# Altium PCB Hex_Link_Trans.PcbDoc
Units mm, origin at the board's own origin, x right, y up, seen from the top; angles counter-clockwise.
Board outline 30.31 x 32.92 mm, 2 copper layers (Top1, Bottom4), stack 1.071 mm thick; 57 components, 58 nets, 261 pads, 73 vias.
Unrouted connection lines stored in the file: 58.
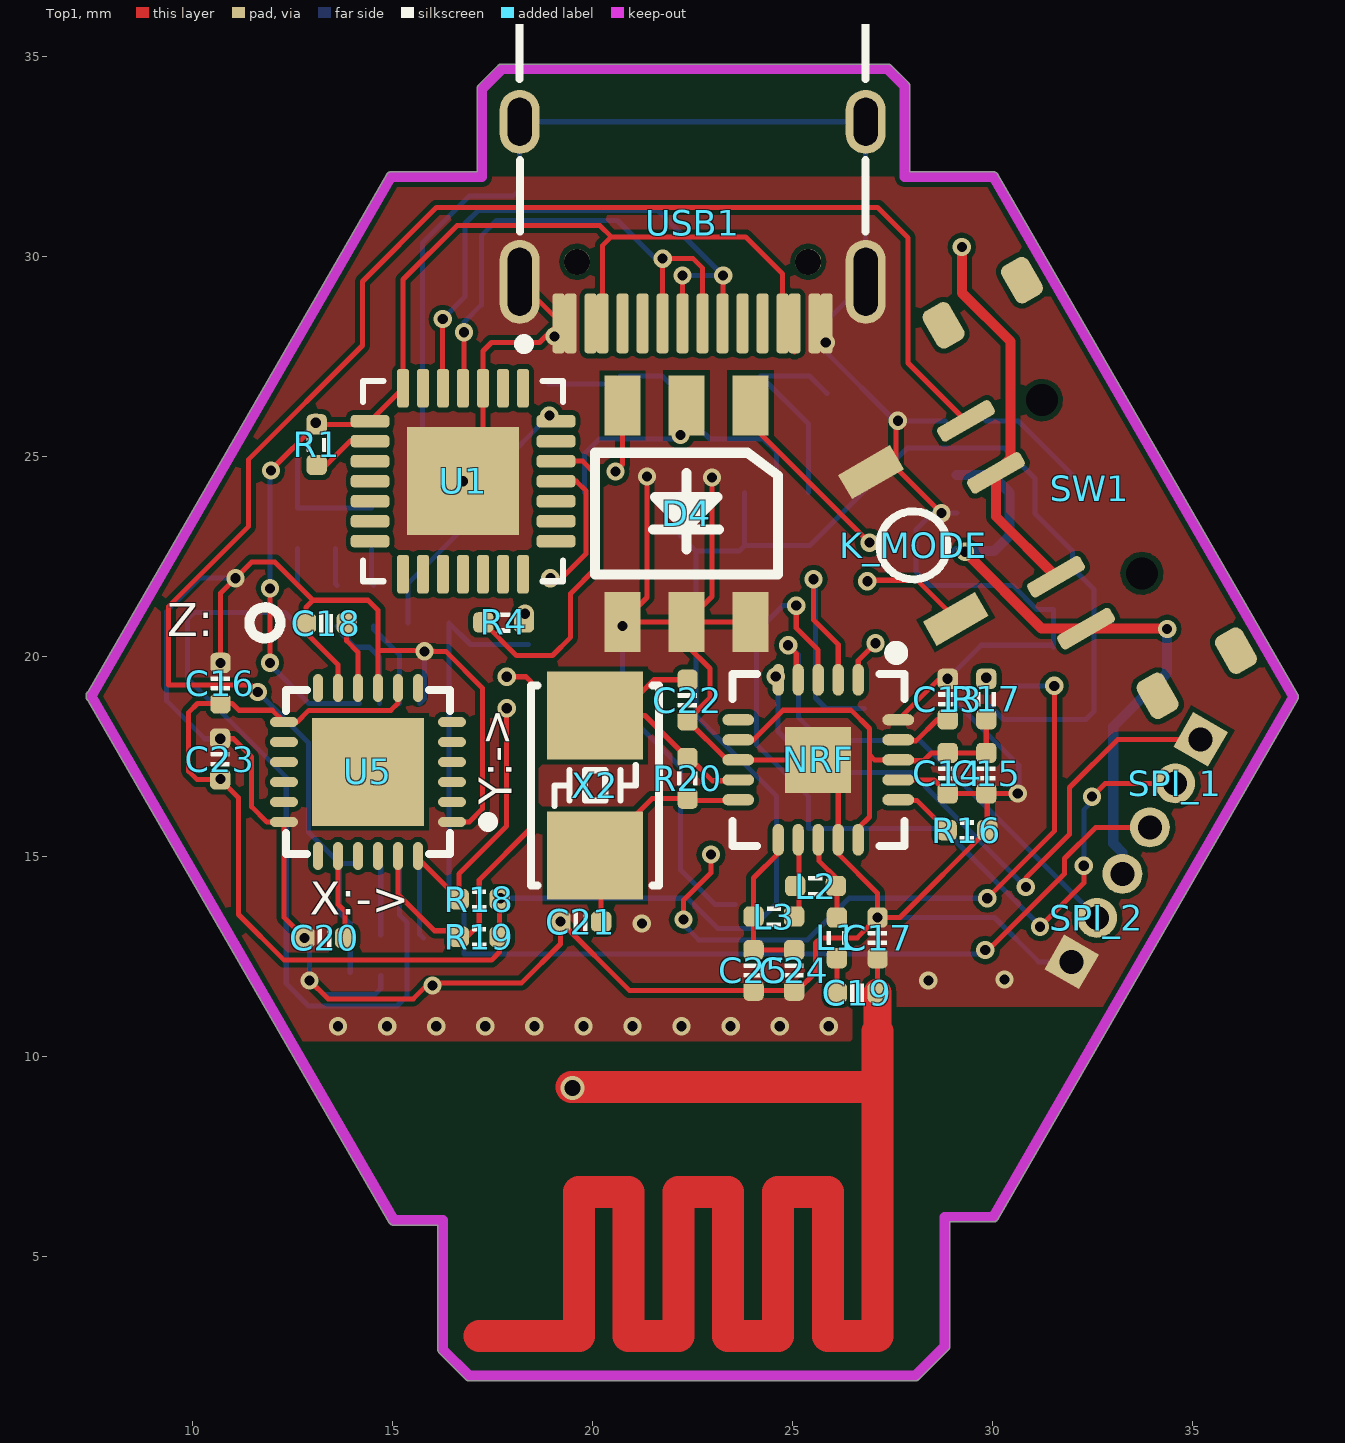
[diagram p0: Top1 view]
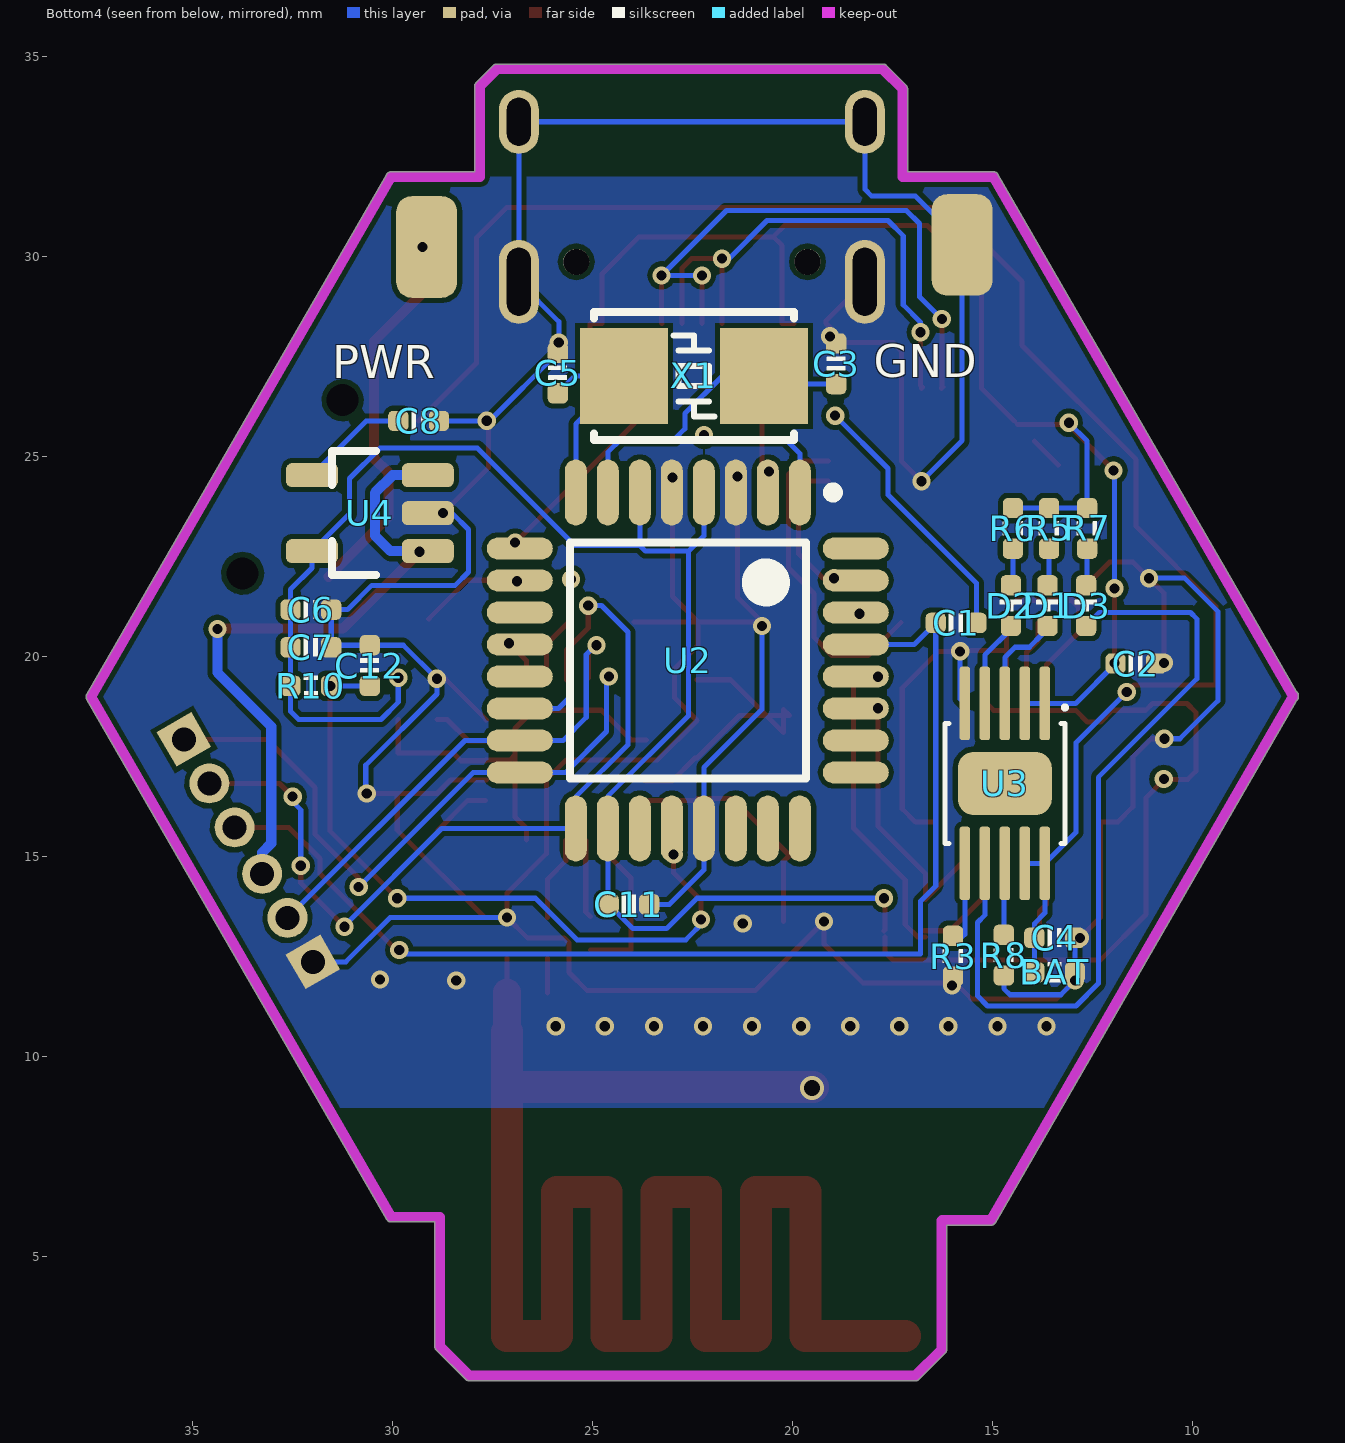
[diagram p1: Bottom4 view, seen from below]
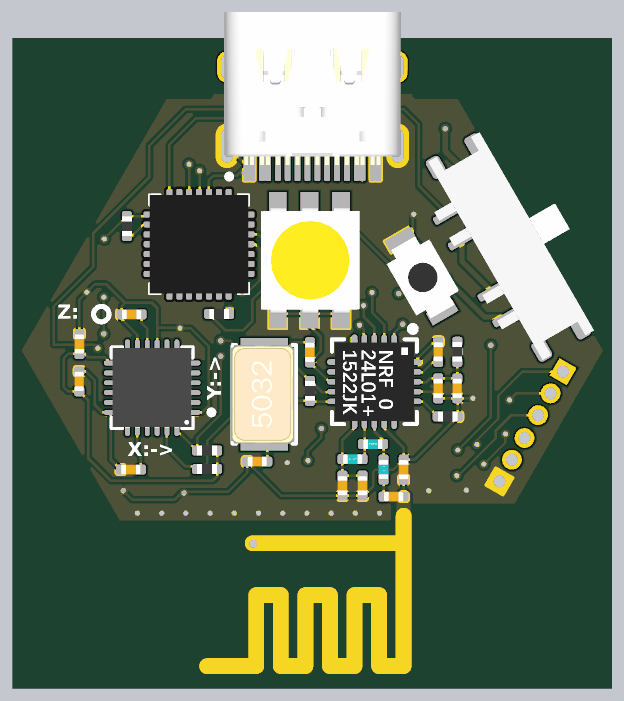
[diagram p2: 3D render of the assembled board from above, using the file's embedded part models]
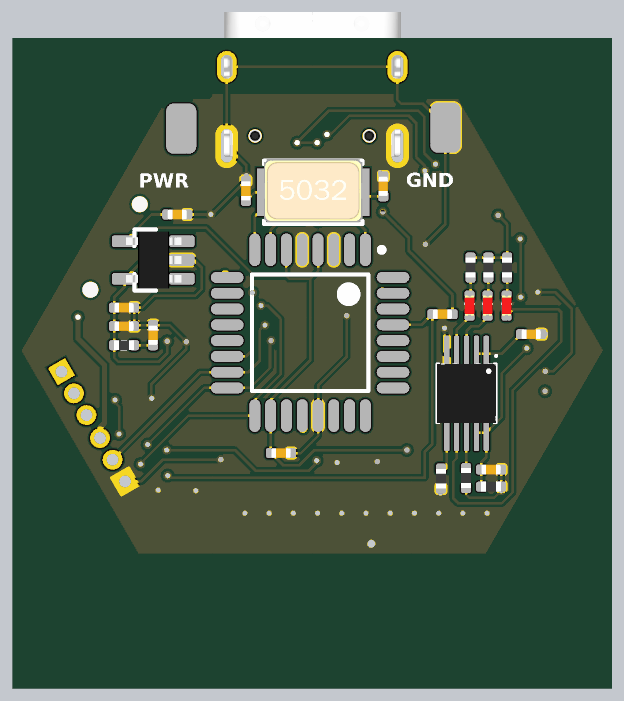
[diagram p3: 3D render of the assembled board from below, using the file's embedded part models]

## Layer stack, top to bottom
Top Solder: solder mask 0.0102, Solder Resist, Dk 3.5
Top1: signal copper 0.0356
Dielectric 2: core 1, PP-006, Dk 4.2
Bottom4: signal copper 0.0356
Bottom Solder: solder mask 0.0102, Solder Resist, Dk 3.5

## Board outline
15.035,5.79 16.136,5.79 16.136,2.685 ccw(c16.264,2.685) 16.174,2.594 16.174,2.595 16.826,1.942 ccw(c16.916,2.032) 16.952,1.91 ccw(c16.99,2.031) 16.99,1.904 28.07,1.904 ccw(c28.07,2.031) 28.16,1.942 28.16,1.941 28.899,2.68 ccw(c28.809,2.77) 28.936,2.77 28.936,5.876 30.023,5.876 ccw(c30.023,6.003) 30.133,5.94 37.633,18.939 37.633,18.94 37.633,18.939 ccw(c37.523,19.003) 37.65,19.003 ccw(c37.523,19.003) 37.633,19.067 30.133,32.067 ccw(c30.023,32.003) 30.02,32.131 ccw(c30.017,32.003) 30.017,32.131 27.935,32.131 27.935,34.269 ccw(c27.807,34.269) 27.897,34.36 27.898,34.359 27.471,34.786 27.471,34.785 ccw(c27.381,34.696) 27.381,34.823 17.729,34.823 ccw(c17.729,34.696) 17.638,34.785 17.639,34.786 17.151,34.298 ccw(c17.241,34.208) 17.114,34.208 17.114,32.131 14.965,32.131 ccw(c14.965,32.003) 14.854,32.067 7.396,19.14 ccw(c7.467,19.034) 7.341,19.021 ccw(c7.467,19.008) 7.396,18.902 14.924,5.854 ccw(c15.035,5.917)

## Design rules (kind name [scope] priority, off if disabled: settings)
Clearance [All] p1: gap=0.127 ignorepadtopadclearanceinfootprint=FALSE
ComponentClearance [All] p1: gap=0 collisioncheckmode=3 verticalgap=0 showdistances=FALSE
DiffPairsRouting [All] p1: maxlimit=0.229 minlimit=0.229 mostfreqgap=0.229 toplayer_minwidth=0.102 toplayer_maxwidth=0.102 toplayer_prefwidth=0.102 bottomlayer_minwidth=0.102 bottomlayer_maxwidth=0.102 bottomlayer_prefwidth=0.102 maxuncoupledlength=12.7
FanoutControl Fanout_BGA [All] p1: bgadir=Out bgaviamode=Centered fanoutstyle=Auto fanoutdirection=Alternating viagrid=0.025 // Fanout_BGA (Default Rule)
HoleSize [All] p1: absolutevalues=TRUE maxlimit=254 minlimit=0.203 maxpercent=80.000 minpercent=20.000
MinimumSolderMaskSliver [All] p1 off: minsoldermaskwidth=0.051
PlaneClearance [All] p1: clearance=0.203
PlaneConnect [All] p1: planeconnectstyle=Direct reliefexpansion=0.508 reliefentries=4 reliefconductorwidth=0.254 reliefairgap=0.254
PolygonConnect [All] p1: connectstyle=Direct reliefconductorwidth=0.254 reliefentries=4 polygonreliefangle="90 Angle" airgapwidth=0.254
RoomDefinition Arduino_Mouse_Keyboard [InComponentClass('Arduino_Mouse_Keyboard')] p1: confinementstyle=ConfineIn formatcopy=TRUE lockcomponents=FALSE outline -0.432,-0.179 46.964,-0.179 46.964,41.198 -0.432,41.198
RoutingVias [All] p1: holewidth=0.203 width=0.406 viastyle="Through Hole" minholewidth=0.152 minwidth=0.305 maxholewidth=0.711 maxwidth=1.27
SilkToBoardRegionClearance [All] p1 off:
SilkToSilkClearance [All] p1: silktosilkclearance=0
SilkToSolderMaskClearance [IsPad] p1: minsilkscreentomaskgap=0 clearancetoexposedcopper=TRUE
SolderMaskExpansion [All] p1: expansion=0.076
Width BAT [InNet('VBAT')] p1: maxlimit=0.254 minlimit=0.254 preferedwidth=0.254
Width BAT_IN [InNet('VBAT_IN')] p2: maxlimit=0.254 minlimit=0.254 preferedwidth=0.254
Width [All] p3: maxlimit=254 minlimit=0.127 preferedwidth=0.127
20 further rules are at their usual default settings.

## Components (designator, comment, footprint, x,y, rotation, side; value= is the part's Value field where it differs from the comment)
BAT "1K" RES_0402 13.436,12.115 r180 bottom
C1 "0.1uF" CAP_0402 15.9,20.853 r180 bottom
C2 "10uF" CAP_0402 11.404,19.837 r180 bottom
C3 "20pF" CAP_0402 18.897,27.33 r90 bottom
C4 "10uF" CAP_0402 13.436,12.979 r0 bottom
C5 "20pF" CAP_0402 25.857,27.101 r90 bottom
C6 "0.1uF" CAP_0402 32.029,21.183 r180 bottom value=0.1u
C7 "10uF" CAP_0402 32.029,20.243 r180 bottom
C8 "10nF" CAP_0402 29.337,25.902 r0 bottom value=0.1u
C11 "0.1uF" CAP_0402 24.079,13.817 r180 bottom
C12 "0.1uF" CAP_0402 30.556,19.786 r90 bottom
C13 "33nF" CAP_0402 28.88,18.948 r270 top
C14 "10nF" CAP_0402 28.88,17.093 r270 top
C15 "10nF" CAP_0402 29.845,17.093 r270 top
C16 "10nF" CAP_0402 10.701,19.345 r90 top value=0.1u
C17 "1.0pF" CAP_0402 27.127,12.979 r270 top
C18 "0.1uF" CAP_0402 13.346,20.843 r180 top value=0.1u
C19 "1.5pF" CAP_0402 26.619,11.607 r0 top
C20 "2.2nF" CAP_0402 13.309,12.979 r0 top value=0.1u
C21 "22pF" CAP_0402 19.71,13.385 r180 top
C22 "22pF" CAP_0402 22.377,18.922 r90 top
C23 "0.1uF" CAP_0402 10.693,17.449 r90 top
C24 "2.2nF" CAP_0402 25.044,12.166 r270 top
C25 "4.7pF" CAP_0402 24.028,12.166 r270 top
D1 "color?" LED_0402_RED 13.614,21.284 r270 bottom
D2 "color?" LED_0402_RED 14.529,21.284 r270 bottom
D3 "color?" LED_0402_RED 12.649,21.284 r270 bottom
D4 "LED-5050" LED-5050W 24.003,26.25 r270 top
K_MODE "RST" SW_PB 27.918,22.826 r120 top
L1 "3.9nH" 0402L_2 26.111,12.979 r90 top
L2 "8.2nH" 0402L_2 25.578,14.274 r180 top
L3 "2.7nH" 0402L_2 24.536,13.512 r0 top
NRF "NRF24L01P-R" QFN20 25.644,17.429 r180 top
R1 "10K" RES_0402 13.106,25.309 r270 top value=22R
R3 "2K" RES_0402 15.976,12.521 r90 bottom value=22R
R4 "200R" RES_0402 17.78,20.865 r180 top value=22R
R5 "1K" RES_0402 13.575,23.215 r270 bottom value=22R
R6 "1K" RES_0402 14.478,23.215 r270 bottom value=22R
R7 "1K" RES_0402 12.624,23.215 r270 bottom value=22R
R8 "10K" RES_0402 14.706,12.547 r90 bottom value=22R
R10 "1K" RES_0402 32.029,19.278 r180 bottom value=22R
R16 "22K" RES_0402 29.362,15.671 r180 top
R17 "0" RES_0402 29.845,18.948 r90 top
R18 "2.2K" RES_0402 17.17,13.944 r0 top
R19 "2.2K" RES_0402 17.17,13.004 r0 top
R20 "1M" RES_0402 22.377,16.966 r90 top
SPI_1 "Header3_1.27mm" HEADER3_1.27mm 35.204,17.939 r330 top
SPI_2 "Header3_1.27mm" HEADER3_1.27mm 31.978,12.379 r150 top
SW1 "4Pin_sw" 4pin_SW 32.486,24.256 r300 top
U1 "CP2102" QFN-28 16.764,24.395 r270 top value=Value
U2 "ATmega8L-8AI" 32A_N 22.606,19.913 r270 bottom
U3 "MCP73833T-AMI/MF" QFN_10_L 14.681,16.839 r90 bottom
U4 "LP2992 3V3" SOT23-5 30.607,23.596 r0 bottom
U5 "MPU6050" QFN-24 14.388,17.127 r180 top
USB1 "Type-C" TYPE-C-TOP 22.504,30.86 r90 top
X1 "16MHz" "OSC 5032-2P" 22.453,27.025 r180 bottom
X2 "16MHz" "OSC 5032-2P" 20.066,16.789 r90 top

## Footprints (in the part's own frame and the unit in brackets; to place one, negate y for a bottom-side part, rotate by r counter-clockwise, add the part's x,y. Pads: shape width x height; smd on the part's side, far side on the other; paste and mask are expansions set on the pad)
4pin_SW [mil]
  rrect50% 42x30 smd: 0(-210.63,42) 0(-210.63,-47) 0(210.63,42) 0(210.63,-47)
  round 10 hole 31.5: 0(-98.43,0) 0(98.43,0)
  rrect50% 16x60 smd: 1(-118.11,-75) 2(-59.06,-75) 3(59.06,-74.8) 4(118.11,-74.8)
  body extent -228,-95 228,122, height 59
32A_N [mm] "Thin QFP, 32-Leads, Body 7x7mm, Pitch 0.8mm, IPC Medium Density"
  oval 1.65x0.55 smd: 1(-4.2,2.8) 2(-4.2,2) 3(-4.2,1.2) 4(-4.2,0.4) 5(-4.2,-0.4) 6(-4.2,-1.2) 7(-4.2,-2) 8(-4.2,-2.8) 17(4.2,-2.8) 18(4.2,-2) 19(4.2,-1.2) 20(4.2,-0.4) 21(4.2,0.4) 22(4.2,1.2) 23(4.2,2) 24(4.2,2.8)
  oval 0.55x1.65 smd: 9(-2.8,-4.2) 10(-2,-4.2) 11(-1.2,-4.2) 12(-0.4,-4.2) 13(0.4,-4.2) 14(1.2,-4.2) 15(2,-4.2) 16(2.8,-4.2) 25(2.8,4.2) 26(2,4.2) 27(1.2,4.2) 28(0.4,4.2) 29(-0.4,4.2) 30(-1.2,4.2) 31(-2,4.2) 32(-2.8,4.2)
  silkscreen extent -4.32,-2.95 2.95,3.75, body extent -3.5,-3.5 3.5,3.5, height 1.2
0402L_2 [mil]
  rrect50% 20x20 smd: 1(20,0) 2(-20,0)
  silkscreen extent -7,-10 7,10, body extent -19,-10 20,10, height 20
CAP_0402 [mil]
  rrect50% 20x20 smd: 1(-20,0) 2(20,0)
  silkscreen extent -7,-9 7,9, body extent -20,-10 20,10, height 20
HEADER3_1.27mm [mm]
  rect 1x1 hole 0.6: 1(0,0)
  round 1 hole 0.6: 2(0,-1.27) 3(0,-2.54)
LED-5050W [mm]
  rect 1.5x0.9 smd: 1(-0.038,-0.051) 2(5.372,-0.051) 3(-0.038,-1.651) 4(5.372,-1.651) 5(-0.038,-3.251) 6(5.372,-3.251)
  silkscreen extent 1.14,-3.94 4.19,0.64, body extent -0.03,-4.11 5.37,0.89, height 1.65
LED_0402_RED [mil]
  rrect50% 20x20 smd: 1(-20,0) 2(20,0)
  silkscreen extent -6,-10 6,11, body extent -20,-10 20,10, height 18
"OSC 5032-2P" [mm]
  rect 2.2x2.4 smd: 1(-1.75,0) 2(1.75,0)
  silkscreen extent -2.5,-1.6 2.5,1.6, body extent -2.5,-1.52 2.5,1.68, height 0.86
QFN20 [mm]
  oval 0.28x0.796 smd: 1(-1.001,-2.002) 2(-0.5,-2.002) 3(0,-2.002) 4(0.5,-2.002) 5(0.998,-2.002)
  oval 0.794x0.28 smd: 6(1.999,-1.001) 7(1.999,-0.5) 8(1.999,0) 9(1.999,0.5) 10(1.999,0.998)
  oval 0.28x0.794 smd: 11(0.998,1.999) 12(0.5,1.999) 13(0,1.999) 14(-0.5,1.999) 15(-1.001,1.999)
  oval 0.796x0.28 smd: 16(-2.002,0.998) 17(-2.002,0.5) 18(-2.002,0) 19(-2.002,-0.5) 20(-2.002,-1.001)
  rect 1.651x1.651 smd: 21(0,0)
  silkscreen extent -2.15,-2.82 2.15,2.15, body extent -2,-2 2,2, height 0.85
QFN-24 [mm] "QFN, 24-Leads, Body 4.1x4.1mm (max), Pitch 0.50mm, IPC Low Density"
  oval 0.7x0.25 smd: 1(-2.1,1.25) 2(-2.1,0.75) 3(-2.1,0.25) 4(-2.1,-0.25) 5(-2.1,-0.75) 6(-2.1,-1.25) 13(2.1,-1.25) 14(2.1,-0.75) 15(2.1,-0.25) 16(2.1,0.25) 17(2.1,0.75) 18(2.1,1.25)
  oval 0.25x0.7 smd: 7(-1.25,-2.1) 8(-0.75,-2.1) 9(-0.25,-2.1) 10(0.25,-2.1) 11(0.75,-2.1) 12(1.25,-2.1) 19(1.25,2.1) 20(0.75,2.1) 21(0.25,2.1) 22(-0.25,2.1) 23(-0.75,2.1) 24(-1.25,2.1)
  rect 2.8x2.7 smd: ""(0,0)
  silkscreen extent -3.13,-2.05 2.05,2.05, body extent -2.02,-2.02 2.02,2.02, height 0.95
QFN-28 [mil]
  rrect50% 38x12 smd mask+5: 1(-91.5,59.06) 2(-91.5,39.37) 3(-91.5,19.68) 4(-91.5,0) 5(-91.5,-19.69) 6(-91.5,-39.37) 7(-91.5,-59.06) 15(91.5,-59.06) 16(91.5,-39.37) 17(91.5,-19.69) 18(91.5,0) 19(91.5,19.68) 20(91.5,39.37) 21(91.5,59.06)
  rrect50% 12x38 smd mask+5: 8(-59.06,-91.5) 9(-39.37,-91.5) 10(-19.69,-91.5) 11(0,-91.5) 12(19.68,-91.5) 13(39.37,-91.5) 14(59.06,-91.5) 22(59.06,91.5) 23(39.37,91.5) 24(19.68,91.5) 25(0,91.5) 26(-19.69,91.5) 27(-39.37,91.5) 28(-59.06,91.5)
  rect 106.3x110.24 smd: 29(0,0)
  silkscreen extent -140,-99 99,98, body extent -99,-99 98,98, height 35
QFN_10_L [mm]
  rrect50% 1.84x0.26 smd: 1(2,-1) 2(2,-0.5) 3(2,0) 4(2,0.5) 5(2,1) 6(-2,1) 7(-2,0.5) 8(-2,0) 9(-2,-0.5) 10(-2,-1)
  rrect50% 1.58x2.35 smd: 11(0,0)
  silkscreen extent -1.5,-1.55 1.95,1.5, body extent -1.5,-1.5 1.5,1.5, height 0.6
RES_0402 [mil]
  rrect50% 20x20 smd: 1(-20,0) 2(20,0)
  silkscreen extent -7,-10 7,10, body extent -20,-10 20,10, height 14
SOT23-5 [mm] "SOT23, 3-Leads, Body 3.1x3.0mm (max), Pitch 0.95mm, IPC Medium Density"
  rrect50% 1.3x0.6 smd: 1(-1.5,0.95) 2(-1.5,0) 3(-1.5,-0.95) 4(1.396,-0.95) 5(1.396,0.95)
  silkscreen extent -0.2,-1.55 0.9,1.55, body extent -1.48,-1.45 1.32,1.45, height 1.2
SW_PB [mm]
  rect 0.7x1.5 smd: 1(-2.203,-0.073) 2(2.032,-0.073)
  silkscreen extent -0.93,-0.92 0.77,0.78, body extent -2.19,-1.35 1.81,1.15, height 1.6
TYPE-C-TOP [mm]
  round 0.65 hole 0.65: 0(-0.98,2.89) 0(-0.98,-2.89)
  oval 1.6x1 hole 0.6 slot 1.2 at 0 deg: 1(2.52,4.325) 2(2.52,-4.325)
  oval 2.1x1 hole 0.6 slot 1.7 at 0 deg: 3(-1.48,-4.325) 4(-1.48,4.325)
  rrect50% 1.5x0.3 smd: A1(-2.52,-3.35) A4(-2.52,-2.55) A5(-2.52,-1.25) A6(-2.52,-0.25) A7(-2.52,0.25) A8(-2.52,1.25) A9(-2.52,2.55) A12(-2.52,3.35) B1(-2.52,3.05) B4(-2.52,2.25) B5(-2.52,1.75) B6(-2.52,0.75) B7(-2.52,-0.75) B8(-2.52,-1.75) B9(-2.52,-2.25) B12(-2.52,-3.05)
  silkscreen extent -0.22,-4.33 5.12,4.33, body extent -2.44,-4.48 5.31,4.48, height 3.26

## Part data
BAT R16 R17 R18 R19 R20: library part RES
C1 C2 C3 C4 C5 C7 C11 C12 C13 C14 C15 C17 C19 C21 C22 C23 C24 C25: library part CAP, "无极性电容"
C6 C8 C16 C18 C20: library part 电容-0402, "Capacitor"
D1 D2 D3: library part LED_0402, "LED", Type=0402
K_MODE: library part SW-PB, "Switch", LatestRevisionDate=17-Jul-2002, LatestRevisionNote="Re-released for DXP Platform.", PackageDescription="Switch; 2 Leads", PackageReference=SPST-2, Published=24-Mar-1999, Publisher="Altium Limited"
L1 L2 L3: library part INDUCTOR, "INDUCTOR"
R1 R3 R4 R5 R6 R7 R8 R10: library part 电阻-0402, "Resistor"
U1: "USBתTTL", MFG #1="SILICON LABS", PART DESC="SINGLE-CHIP USB TO UART BRIDGE, QFN28, RoHS.", PART NUMBER=CP2102, RefDes=RefDes, Type=DEV
U2: "8-Bit AVR Microcontroller with 8K Bytes of In-System Programmable Flash Memory", Code_JEDEC=MS-026-ABA, ComponentLink1Description="Manufacturer Link", ComponentLink1URL=http://www.atmel.com, ComponentLink2Description=Datasheet, ComponentLink2URL=http://www.atmel.com/dyn/resources/prod_documents/doc2486.pdf, DatasheetVersion=2486H-AVR-09/02, LatestRevisionDate=13-Apr-2006, LatestRevisionNote="IPC-7351 Footprint Added.", PackageDescription="32-Pin Thin Quad Flat Pack 0.8 mm Pitch", PackageReference=32A, PackageVersion="revB, Oct-2001", Published=17-Sep-2003, Publisher="Altium Limited"
U3: library part MCP73833T, "Linear Charge Management Controller Li-Ion/Li-Pol 1mA 4.2V/4.35V/4.4V/4.5V 10-Pin DFN EP T/R", Package="DFN-10 Microchip", Availability=Unavailable, MF=Microchip, MP=MCP73833T-AMI/MF, Price=None, SnapEDA_Link=https://www.snapeda.com/parts/MCP73833T-AMI/MF/Microchip/view-part/?ref=snap
U4: library part LP2992, "LDO"
U5: "六轴传感器"
USB1: library part USB-Type-C-TOP
X1 X2: library part XTAL-2P, "2脚无源脚晶振"

## Free pads (board coordinates)
  rrect50% 1.524x2.54 smd far side: ""(15.748,30.301) ""(29.134,30.251)

## Via types
v1: diameter 0.457, hole 0.254, Top1 to Bottom4, tented both sides, 72 vias
v2: diameter 0.6, hole 0.4, Top1 to Bottom4, tented both sides, 1 vias

## Nets (pads, with @x,y where several pads share a name; then routed paths per layer and width w, separated by ;. In a path a pad name is that pad's centre, name@x,y a point inside that pad or via, vN(x,y) a via of type N, cw(c..) or ccw(c..) an arc to the next point about the centre after c; other vN are vias at no path point)
3V3: C6.1 C7.1 C11.1 C16.1 C23.1 R10.1 R17.2 R18.2 R19.2 U2.4 U2.6 U2.18 U4.5 U5.8 U5.13 | length 60.2
  Top1 w0.127: U5.8@15.175,19.264 U5.8 15.138,18.845 14.96,18.667 12.909,18.667 12.618,18.377 U5.13 11.996,18.668 11.161,18.668 10.992,18.837 C16.1 10.125,18.837 9.906,18.617 9.906,17.144 10.109,16.941 C23.1 11.15,16.484 11.15,13.563 12.293,12.42 17.475,12.42 17.678,12.623 R19.2 ; R18.2 17.678,13.182 R19.2@17.704,13.156
  Bottom4 w0.127: v1(17.704,13.969) 22.377,13.969 23.139,13.207 23.977,13.207 C11.1 24.606,13.836 U2.18 24.606,16.516 22.591,18.531 22.591,22.646 ; U2.4 22.206,23.031 22.591,22.646 ; U2.6 23.806,22.789 ; v1(29.845,19.481) 29.845,18.871 30.277,18.44 32.334,18.44 32.537,18.643 R10.1 C7.1 C6.1 32.537,21.691 32.002,22.226 U4.5 31.064,23.584 31.064,24.459 30.302,25.221 27.864,25.221 25.431,22.789 23.806,22.789 ; 22.591,22.646 23.662,22.646 23.806,22.789
  other v1: 10.705,16.949
A0: U2.23
A1: U2.24
A2: U2.25
A3: U2.26
A4: R18.1 U2.27 U5.24 | length 6.8
  Top1 w0.127: U5.24 15.638,14.968 R18.1 16.662,14.579 17.856,15.773 v1(17.856,18.719)
A5: R19.1 U2.28 U5.23 | length 10.8
  Top1 w0.127: U5.23@15.15,15.015 U5.23 15.138,14.071 16.053,13.156 R19.1@16.688,13.156 ; R19.1 16.865,13.004 17.17,13.309 17.17,14.426 18.466,15.722 18.466,19.379 18.339,19.506 v1(17.856,19.506)
A6: U2.19
A7: U2.22
AREF: C12.1 R10.2 U2.20 | length 17.2
  Top1 w0.127: v1(22.276,13.436) 22.276,13.918 22.961,14.604 v1(22.961,15.061) ; v1(29.87,13.969) 31.547,15.646 v1(31.547,19.278)
  Bottom4 w0.127: v1@22.174,13.41 22.657,12.928 25.374,12.928 26.416,13.969 v1(29.87,13.969) ; C12.1 R10.2
CP_Rx: U1.25 U2.31 | length 3.6
  Top1 w0.127: v1(18.948,21.97) 19.228,21.97 19.837,22.58 19.837,24.155 19.597,24.395 U1.25
CP_Tx: R4.1 U2.30
  other v1: 18.313,21.081
D2: U2.32
D3: D4.5 U2.2 | length 1.7
  Top1 w0.127: v1(20.574,24.637) 20.752,24.815 D4.5
D4: D4.3 U2.1 | length 3.6
  Bottom4 w0.127: U2.1 19.806,25.088 20.167,25.45 22.098,25.45 v1(22.199,25.552)
D5: D4.1 U2.9 | length 4.7
  Top1 w0.127: D4.1 23.952,25.831 v1(26.924,22.859)
D6: K_MODE.1 U2.10 | length 2.6
  Top1 w0.127: v1@26.898,21.919 28.118,21.919 K_MODE.1
  other v1: 26.873,21.894
D7: U2.11
D8: NRF.1 U2.12 | length 1.1
  Top1 w0.127: NRF.1 26.644,19.913 v1(27.076,20.345)
D9: U2.13
D10: NRF.2 U2.14 | length 7.1
  Top1 w0.127: v1(25.527,21.945) 25.527,20.929 26.144,20.312 NRF.2
  Bottom4 w0.127: v1(25.527,21.945) 25.578,21.894 25.578,18.973 25.838,18.713 U2.14
D11/MOSI: NRF.4 SPI_2.2 U2.15 | length 12.4
  Top1 w0.127: v1(24.892,20.294) 25.095,20.091 25.095,19.478 NRF.4
  Bottom4 w0.127: v1@24.892,20.319 25.146,20.065 25.146,18.49 25.723,17.913 U2.15 28.18,17.913 SPI_2.2
D12/MISO: NRF.5 SPI_1.1 U2.16 | length 15.9
  Top1 w0.127: v1(30.835,14.249) 30.835,14.477 31.928,15.569 31.928,16.738 33.129,17.939 SPI_1.1
  Bottom4 w0.127: v1(24.581,19.513) 24.638,19.456 24.638,18.135 25.66,17.113 U2.16 27.971,17.113 v1(30.835,14.249)
D13/SCK: NRF.3 SPI_1.2 U2.17 | length 21.5
  Top1 w0.127: v1(25.095,21.284) 25.095,20.722 25.644,20.173 NRF.3 ; v1(31.191,13.258) 32.283,14.35 v1(32.283,14.782) ; v1(32.486,16.509) 32.817,16.839 SPI_1.2
  Bottom4 w0.127: v1(25.095,21.284) 24.765,21.284 24.104,20.624 24.104,17.805 25.406,16.503 U2.17 28.762,15.713 v1@31.14,13.334 ; v1(32.283,14.782) 32.283,16.179 v1@32.55,16.446
MCU_GND: BAT.2 C2.2 C3.2 C4.1 C5.2 C6.2 C7.2 C8.1 C11.2 C12.2 C13.1 C14.2 C15.2 C16.2 C17.1 C17.2 C18.2 C19.2 C20.1 C21.2 C22.1 C23.2 C24.2 C25.2 D4.2 D4.4 D4.6 K_MODE.2 NRF.8 NRF.14 NRF.17 NRF.20 NRF.21 pad.@15.748,30.301 R3.1 R8.1 R16.1 SPI_2.1 U1.3 U1.29 U2.3 U2.5 U2.21 U3.5 U4.2 U5.1 U5.9 U5.11 U5.18 USB1.1 USB1.2 USB1.3 USB1.4 USB1.A1 USB1.A12 USB1.B1 USB1.B12 | length 199.2
  Top1 w0.127: v1(10.693,17.957) 11.023,17.957 11.481,17.5 11.481,16.255 11.859,15.877 U5.18 12.288,13.492 v1(12.801,12.979) ; v1(10.701,19.853) 10.701,21.597 v1(11.074,21.97) 11.481,22.377 12.059,22.377 13.016,21.419 ; v1(12.928,11.912) 13.386,11.455 15.523,11.455 15.922,11.854 18.23,11.854 19.202,12.826 v1(19.202,13.385) 20.929,11.658 C25.2 C24.2 25.12,11.658 25.578,12.115 25.578,12.852 25.705,12.979 26.619,12.979 v1(27.127,13.487) ; U5.11 13.638,19.807 12.838,20.607 C18.2 12.838,21.242 13.016,21.419 ; U5.9 14.638,20.167 ; U5.1 16.919,15.877 17.246,16.204 17.246,19.227 16.332,20.141 16.027,20.141 16.002,20.167 14.638,20.167 ; v1(16.764,24.395) 17.264,24.895 U1.3 17.264,27.652 17.475,27.863 18.677,27.863 USB1.A12 19.154,28.405 USB1.4 ; v1(21.361,24.51) 21.361,21.488 D4.6 D4.4 ; v1(22.987,24.485) 22.987,21.513 D4.4 ; D4.2 D4.4 ; C19.2 C17.2 ; v1@27.584,25.907 27.584,24.739 v1(28.727,23.596) ; NRF.17 28.537,16.928 C14.2 C15.2 ; NRF.20 28.671,19.456 v1(28.88,19.456) ; v1(30.632,16.585) C15.2 ; 13.016,21.419 14.388,21.419 14.638,21.169 14.638,20.167 ; D4.4 22.352,20.294 22.936,19.71 22.936,18.973 C22.1 23.363,17.429 NRF.8 NRF.21 26.144,16.928 NRF.14 26.144,15.079 27.127,14.096 v1(27.127,13.487) ; v1(27.127,13.487) 27.686,13.487 R16.1 29.87,16.56 C15.2
  Top1 w0.7: 27.127,10.642 C19.2
  Top1 w0.8: 17.172,3.023 19.661,3.023 19.661,6.623 20.905,6.623 20.905,3.023 22.149,3.023 22.149,6.623 23.394,6.623 23.394,3.023 24.638,3.023 24.638,6.623 25.883,6.623 25.883,3.023 27.127,3.023 27.127,10.642 ; v2@19.482,9.246 27.102,9.246
  Bottom4 w0.127: v1(10.693,17.957) 10.306,17.957 9.356,18.907 9.356,21.141 10.185,21.97 v1@11.049,21.97 ; C4.1 BAT.2 v1(12.928,11.912) 13.284,11.556 14.554,11.556 14.706,11.709 R8.1 ; U3.5 15.799,18.957 v1(15.799,20.141) ; v1(16.764,24.395) 15.748,25.411 15.748,30.301 15.748,30.352 16.916,31.521 18.008,31.521 18.179,31.691 USB1.1 USB1.2 USB1.3 25.832,28.383 v1(25.832,27.863) ; v1(20.752,20.776) 20.752,18.694 22.206,17.239 U2.21 22.206,14.674 23.063,13.817 C11.2 ; C5.2 27.564,25.902 C8.1 ; v1(27.127,13.487) 30.048,13.487 31.156,12.379 SPI_2.1 SPI_2.1@31.978,12.242 ; U4.2 28.499,23.596 28.092,23.189 28.092,22.123 28.422,21.792 30.505,21.792 31.115,21.183 C6.2 C7.2 31.47,20.294 C12.2 29.718,20.294 v1(28.88,19.456) 28.88,19.075 30.658,17.297 v1@30.658,16.585
  other v1: 13.64,10.77 14.867,10.77 16.093,10.77 17.32,10.77 18.547,10.77 19.774,10.77 21.001,10.77 22.228,10.77 23.454,10.77 24.681,10.77 25.908,10.77 16.002,11.785 28.397,11.912 30.302,11.938 21.234,13.335 27.635,25.907 19.05,28.015
  other v2: 19.507,9.219
NetBAT_1: BAT.1 C4.2 SW1.1 U3.9 U3.10 | length 42.8
  Top1 w0.127: v1(11.633,19.125) 11.455,19.303 9.398,19.303 9.398,21.259 11.404,23.266 11.404,24.942 14.249,27.787 14.249,29.387 16.103,31.241 27.127,31.241 27.889,30.479 27.889,27.349 SW1.1
  Bottom4 w0.127: v1(11.633,19.125) 12.903,17.855 12.903,15.617 U3.10 ; BAT.1 C4.2 13.944,13.334 13.681,13.598 U3.10 ; U3.9 U3.10
NetC1_2: C1.2 U1.28 | length 6.6
  Bottom4 w0.127: C1.2 15.392,21.843 17.602,24.053 17.602,24.713 v1(18.923,26.034)
NetC3_1: C3.1 U2.7 X1.2 | length 7.8
  Bottom4 w0.127: C3.1 20.5,26.822 X1.2 21.742,27.025 22.682,26.085 22.682,25.704 22.936,25.45 24.276,25.45 24.606,25.12 U2.7
NetC5_1: C5.1 U2.8 X1.1 | length 5.2
  Bottom4 w0.127: U2.8 25.406,25.822 X1.1 25.425,27.025 C5.1
NetC8_2: C8.2 U4.4 | length 2.7
  Bottom4 w0.127: C8.2 30.646,25.902 U4.4
NetC13_2: C13.2 NRF.19 | length 1.4
  Top1 w0.127: NRF.19@27.66,17.906 28.092,17.906 28.626,18.44 C13.2
NetC14_1: C14.1 C15.1 NRF.7 NRF.15 NRF.18 R17.1 | length 10.5
  Top1 w0.127: NRF.7 24.026,17.929 24.765,18.668 26.467,18.668 26.924,18.211 26.924,17.551 ; NRF.15 26.644,15.722 26.924,16.001 26.924,17.551 ; NRF.18 27.046,17.429 26.924,17.551 ; NRF.18@27.66,17.406 28.278,17.406 28.473,17.601 C14.1 C15.1 R17.1
NetC18_1: C18.1 U5.10 | length 1.7
  Top1 w0.127: C18.1 13.854,20.403 14.138,20.12 U5.10
NetC19_1: C19.1 L1.2 | length 0.9
  Top1 w0.127: C19.1 L1.2
NetC20_2: C20.2 U5.20 | length 2.1
  Top1 w0.127: U5.20 13.638,13.819 13.817,13.639 C20.2
NetC21_1: C21.1 NRF.10 R20.1 X2.1 | length 5.9
  Top1 w0.127: C21.1 20.218,14.886 X2.1 21.486,16.458 R20.1 22.428,16.408 NRF.10@23.66,16.408
NetC22_2: C22.2 NRF.9 R20.2 X2.2 | length 7.8
  Top1 w0.127: C22.2 21.539,19.43 X2.2@20.647,18.539 ; NRF.9@23.66,16.905 22.997,16.905 22.428,17.474 R20.2 21.313,18.539 X2.2@20.647,18.539 ; X2.2@20.218,18.539 X2.2@20.647,18.539 ; X2.2@20.218,18.539 X2.2 20.218,18.691 X2.2@20.218,18.539 ; X2.2@20.218,18.539 20.218,18.109 X2.2@20.647,18.539
NetC24_1: C24.1 C25.1 L3.2 NRF.11 | length 4
  Top1 w0.127: NRF.11@24.661,15.407 24.661,15.108 24.028,14.476 L3.2 C25.1 C24.1
NetD1_1: D1.1 R5.2 | length 0.9
  Bottom4 w0.127: R5.2 13.575,21.832 D1.1
NetD1_2: D1.2 U3.3 | length 2.6
  Bottom4 w0.127: D1.2 13.741,20.649 13.741,20.573 14.071,20.243 14.427,20.243 14.681,19.989 U3.3
NetD2_1: D2.1 R6.2 | length 0.9
  Bottom4 w0.127: R6.2 14.478,21.843 D2.1
NetD2_2: D2.2 U3.4 | length 2.2
  Bottom4 w0.127: D2.2 14.529,20.7 15.181,20.048 U3.4
NetD3_1: D3.1 R7.2 | length 0.9
  Bottom4 w0.127: R7.2 12.624,21.818 D3.1
NetD3_2: D3.2 U3.7 | length 19.9
  Bottom4 w0.127: D3.2 12.313,21.113 10.039,21.113 9.88,20.954 9.88,19.456 12.344,16.992 12.344,11.836 12.903,11.277 15.113,11.277 15.367,11.531 15.367,13.36 15.181,13.545 U3.7
NetL1_1: L1.1 L2.2 NRF.13 | length 2.1
  Top1 w0.127: NRF.13@25.659,15.407 25.659,14.904 26.111,14.452 L1.1
NetL2_1: L2.1 L3.1 NRF.12 | length 1.9
  Top1 w0.127: L3.1 25.158,13.626 NRF.12@25.158,15.407
NetNRF_16: NRF.16 R16.2 | length 1.5
  Top1 w0.127: NRF.16@27.66,16.408 28.118,16.408 R16.2
NetR1_2: R1.2 U1.9 | length 0.8
  Top1 w0.127: R1.2@13.346,24.801 13.94,25.395
NetR3_2: R3.2 U3.6 | length 1.9
  Bottom4 w0.127: U3.6 15.681,13.069 R3.2@15.772,12.979
NetR4_2: R4.2 U1.26 | length 8.2
  Top1 w0.127: R4.2 18.097,20.04 18.999,20.04 19.454,20.495 19.454,21.587 20.091,22.224 20.091,24.561 19.758,24.895 U1.26
NetR8_2: R8.2 U3.8 | length 1.8
  Bottom4 w0.127: U3.8 14.706,14.814 R8.2
NRF_IRQ: NRF.6
RESET: C1.1 SPI_1.3 U2.29 | length 29.6
  Top1 w0.127: v1(29.819,12.674) 29.896,12.674 31.801,14.579 31.801,14.96 32.58,15.74 SPI_1.3
  Bottom4 w0.127: U2.29 16.948,20.313 C1.1 16.408,14.274 16.789,13.893 16.789,12.572 29.946,12.572 29.845,12.674 v1(29.819,12.674)
USB-PWR-DM: U1.5 USB1.A7 USB1.B7 | length 15
  Top1 w0.127: v1(16.256,28.447) 16.256,26.777 16.23,26.752 U1.5 ; USB1.A7 v1@22.254,29.535 ; USB1.B7 23.266,28.352 v1(23.266,29.539)
  Bottom4 w0.127: v1(16.256,28.447) 16.815,29.006 16.815,30.835 17.145,31.165 21.641,31.165 v1(23.266,29.539) v1(22.25,29.539)
USB-PWR-DP: U1.4 USB1.A6 USB1.B6 | length 13.2
  Top1 w0.127: U1.4 16.738,26.744 16.789,26.795 v1(16.789,28.117) ; USB1.B6 v1(21.754,29.958) 22.517,29.958 22.754,29.721 USB1.A6
  Bottom4 w0.127: v1(16.789,28.117) 16.789,28.371 17.221,28.803 17.221,30.53 17.602,30.911 20.625,30.911 21.577,29.958 v1(21.754,29.958)
VBAT: SPI_2.3 SW1.4 U4.1 U4.3 | length 16.7
  Top1 w0.254: v1(29.311,22.631) 31.234,20.708 SW1.4 34.359,20.708 v1(34.366,20.701)
  Bottom4 w0.254: U4.1 30.038,22.646 30.429,23.037 30.429,24.104 29.987,24.546 U4.3 ; SPI_2.3 33.248,15.113 33.02,15.342 33.02,18.263 34.366,19.609 v1(34.366,20.701)
VBAT_IN: pad.@29.134,30.251 SW1.2 SW1.3 | length 9.5
  Top1 w0.254: v1(29.235,30.251) 29.235,29.108 30.454,27.888 30.454,24.971 SW1.2 30.087,23.511 SW1.3
VDD_5V: C2.1 R1.1 R5.1 R6.1 R7.1 U1.7 U1.8 U3.1 U3.2 USB1.A4 USB1.A9 USB1.B4 USB1.B9 | length 33.8
  Top1 w0.127: v1(11.938,19.853) v1(11.938,21.716) ; v1@11.938,24.649 R1.1 U1.8@14.362,25.817 ; U1.8 U1.7 15.264,29.436 16.611,30.784 20.189,30.784 20.468,30.505 ; USB1.A9 USB1.B4 20.254,30.291 20.468,30.505 ; USB1.A4@25.054,27.624 USB1.A4 USB1.B9 24.754,29.575 23.825,30.505 20.468,30.505
  Bottom4 w0.127: C2.1 12.91,18.839 U3.1 U3.2 ; v1(11.938,21.716) v1@11.938,24.663 ; v1(13.081,25.856) 12.624,25.399 R7.1 R5.1 R6.1
  other v1: 11.963,24.663
pads on no net: SW1.0 U1.1 U1.2 U1.6 U1.10 U1.11 U1.12 U1.13 U1.14 U1.15 U1.16 U1.17 U1.18 U1.19 U1.20 U1.21 U1.22 U1.23 U1.24 U1.27 U3.11 U5. U5.2 U5.3 U5.4 U5.5 U5.6 U5.7 U5.12 U5.14 U5.15 U5.16 U5.17 U5.19 U5.21 U5.22 USB1.0 USB1.A5 USB1.A8 USB1.B5 USB1.B8

## Polygon pours and split planes (outlines as drawn)
MCU_GND on Top1 "Top1-MCU_GND" (solid, pour order 16): 30.023,32.003 37.551,19.021 35.758,15.69 32.978,11.125 32.851,11.252 26.492,11.252 26.492,10.439 26.441,10.389 12.455,10.389 10.913,12.847 7.467,19.034 12.455,27.472 14.965,32.003
no net on Top1 "Top1-No Net" (solid, pour order 6): -59.665,42.112
MCU_GND on Bottom4 "Bottom4-MCU_GND" (solid, pour order 18): 14.965,32.003 30.017,32.003 37.452,18.805 35.52,15.277 31.953,9.423 31.598,8.733 13.483,8.733 13.437,8.687 9.488,15.277 7.469,19.067

## Keep-outs
Keep-Out Layer:
  lines w0.254: 7.467,19.008 14.965,32.003 17.241,32.003 17.241,34.208 17.729,34.696 27.381,34.696 27.807,34.269 27.807,32.003 30.017,32.003 ; 7.467,19.034 15.035,5.917 16.256,5.917 ; 16.264,5.912 16.264,2.685 16.916,2.032 ; 16.99,2.031 28.07,2.031 28.809,2.77 28.809,5.998 ; 28.801,6.003 30.023,6.003 37.523,19.003 30.023,32.003

## Silkscreen, mask and mechanical layers (free items; w line width, h text height)
Top Overlay:
  circle w0.254: c11.811,20.853 r0.39
  text "Z:" at 9.373,20.244 h1.4
  text "Y:->" at 18.262,16.306 h1.4 r90
  text "X:->" at 12.929,13.284 h1.4
Bottom Overlay:
  lines w0.025: 51.294,-34.748 51.319,-34.748 ; 51.294,-34.723 51.319,-34.723 ; 51.294,-34.697 51.319,-34.697
  text "GND" at 17.958,26.72 h1.4
  text "PWR" at 31.496,26.695 h1.4